# Altium PCB driver_l4_2023-07-21.pcbdoc (part 1 of 2)
Units mil, origin at the board's own origin, x right, y up, seen from the top; angles counter-clockwise.
Board outline 2980 x 3085.67 mil, 2 copper layers (Top Layer, Bottom Layer); 71 components, 86 nets, 273 pads, 209 vias.
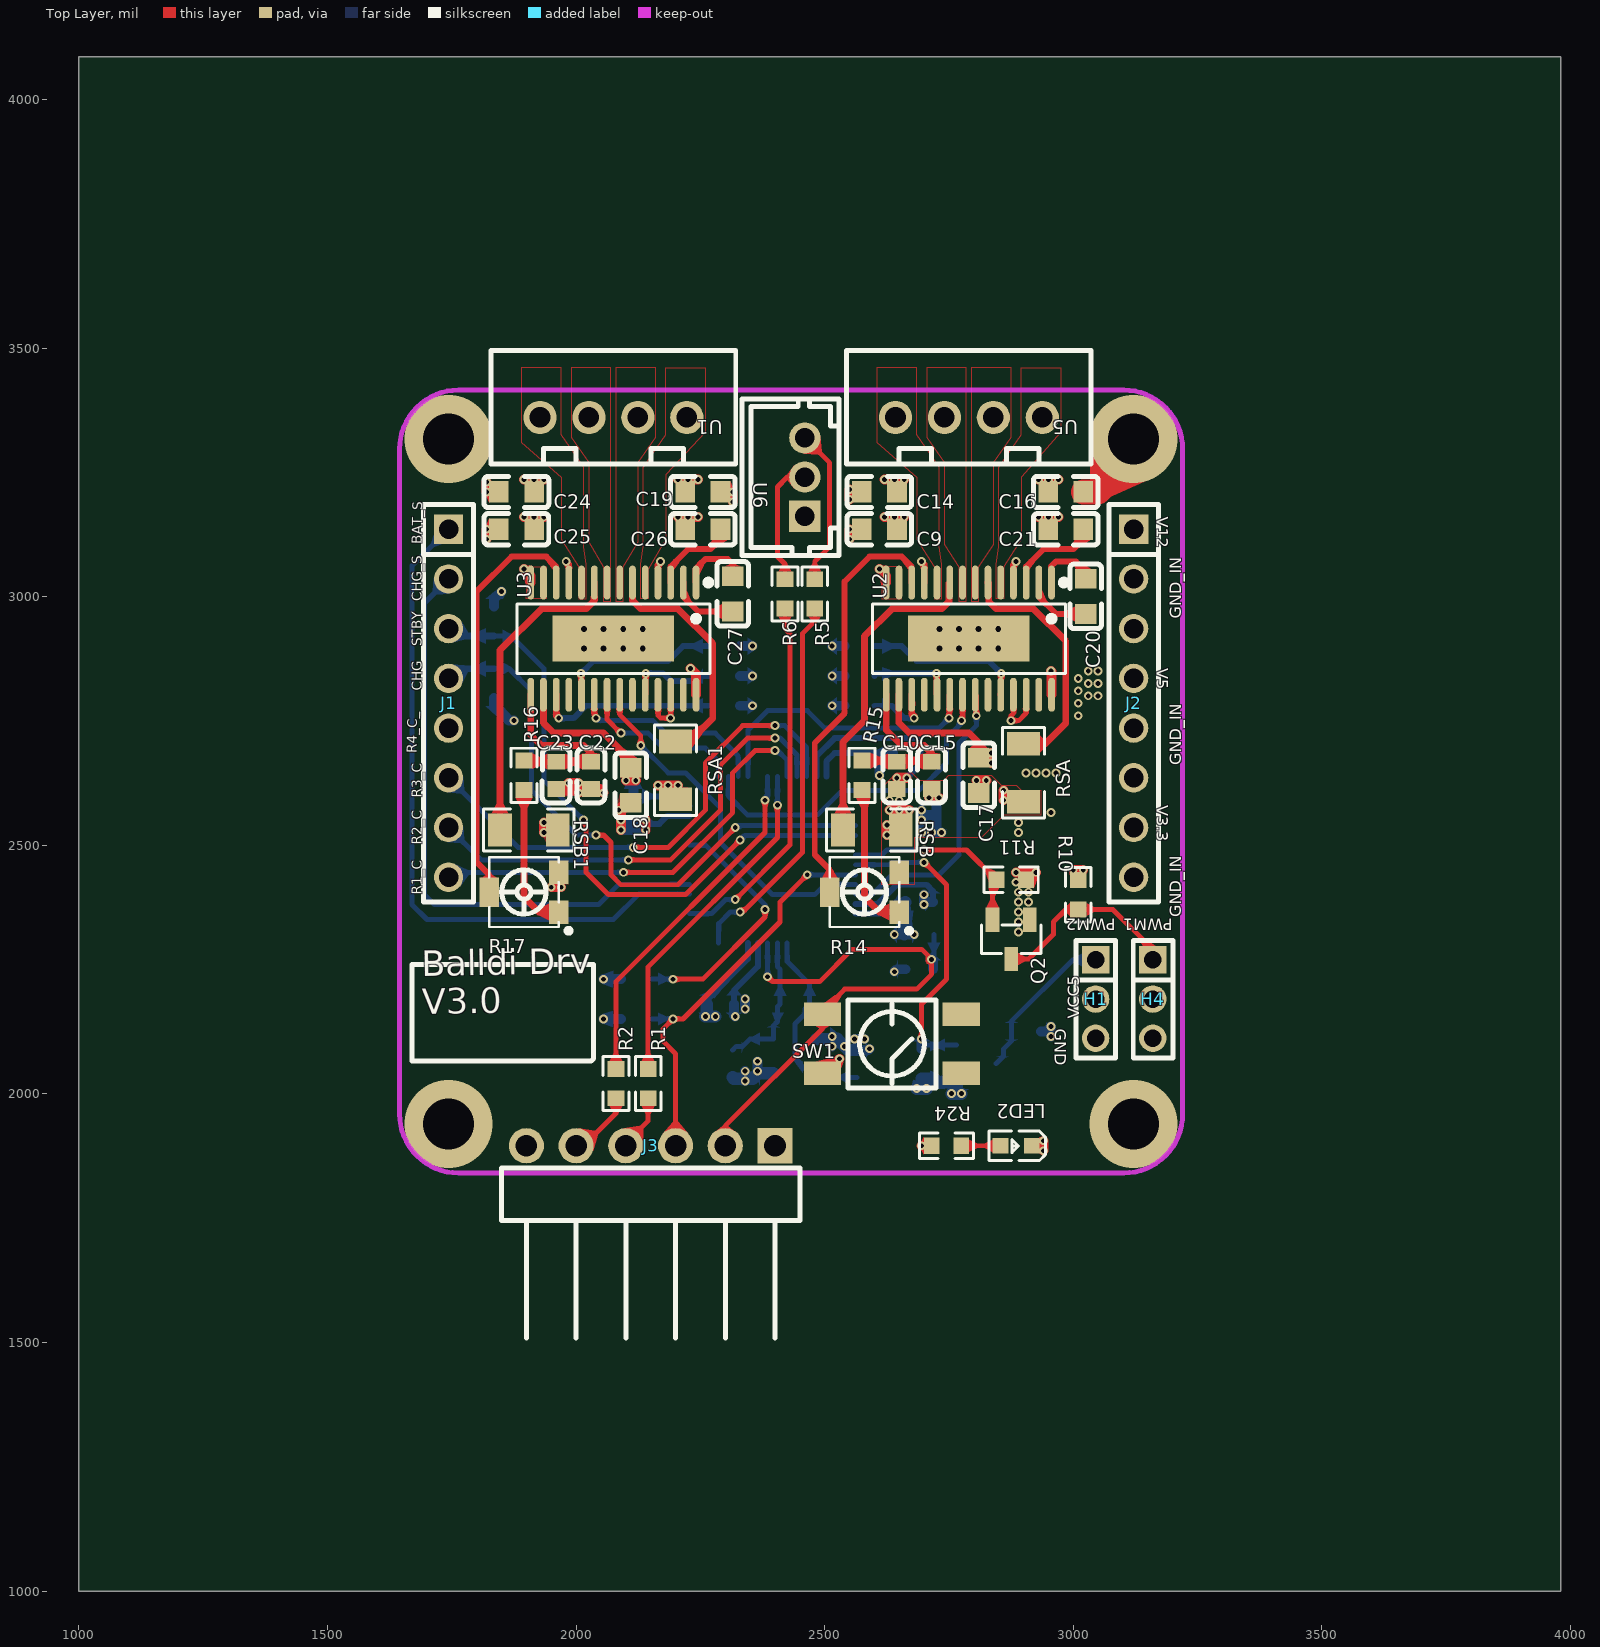
[diagram p0: Top Layer view]
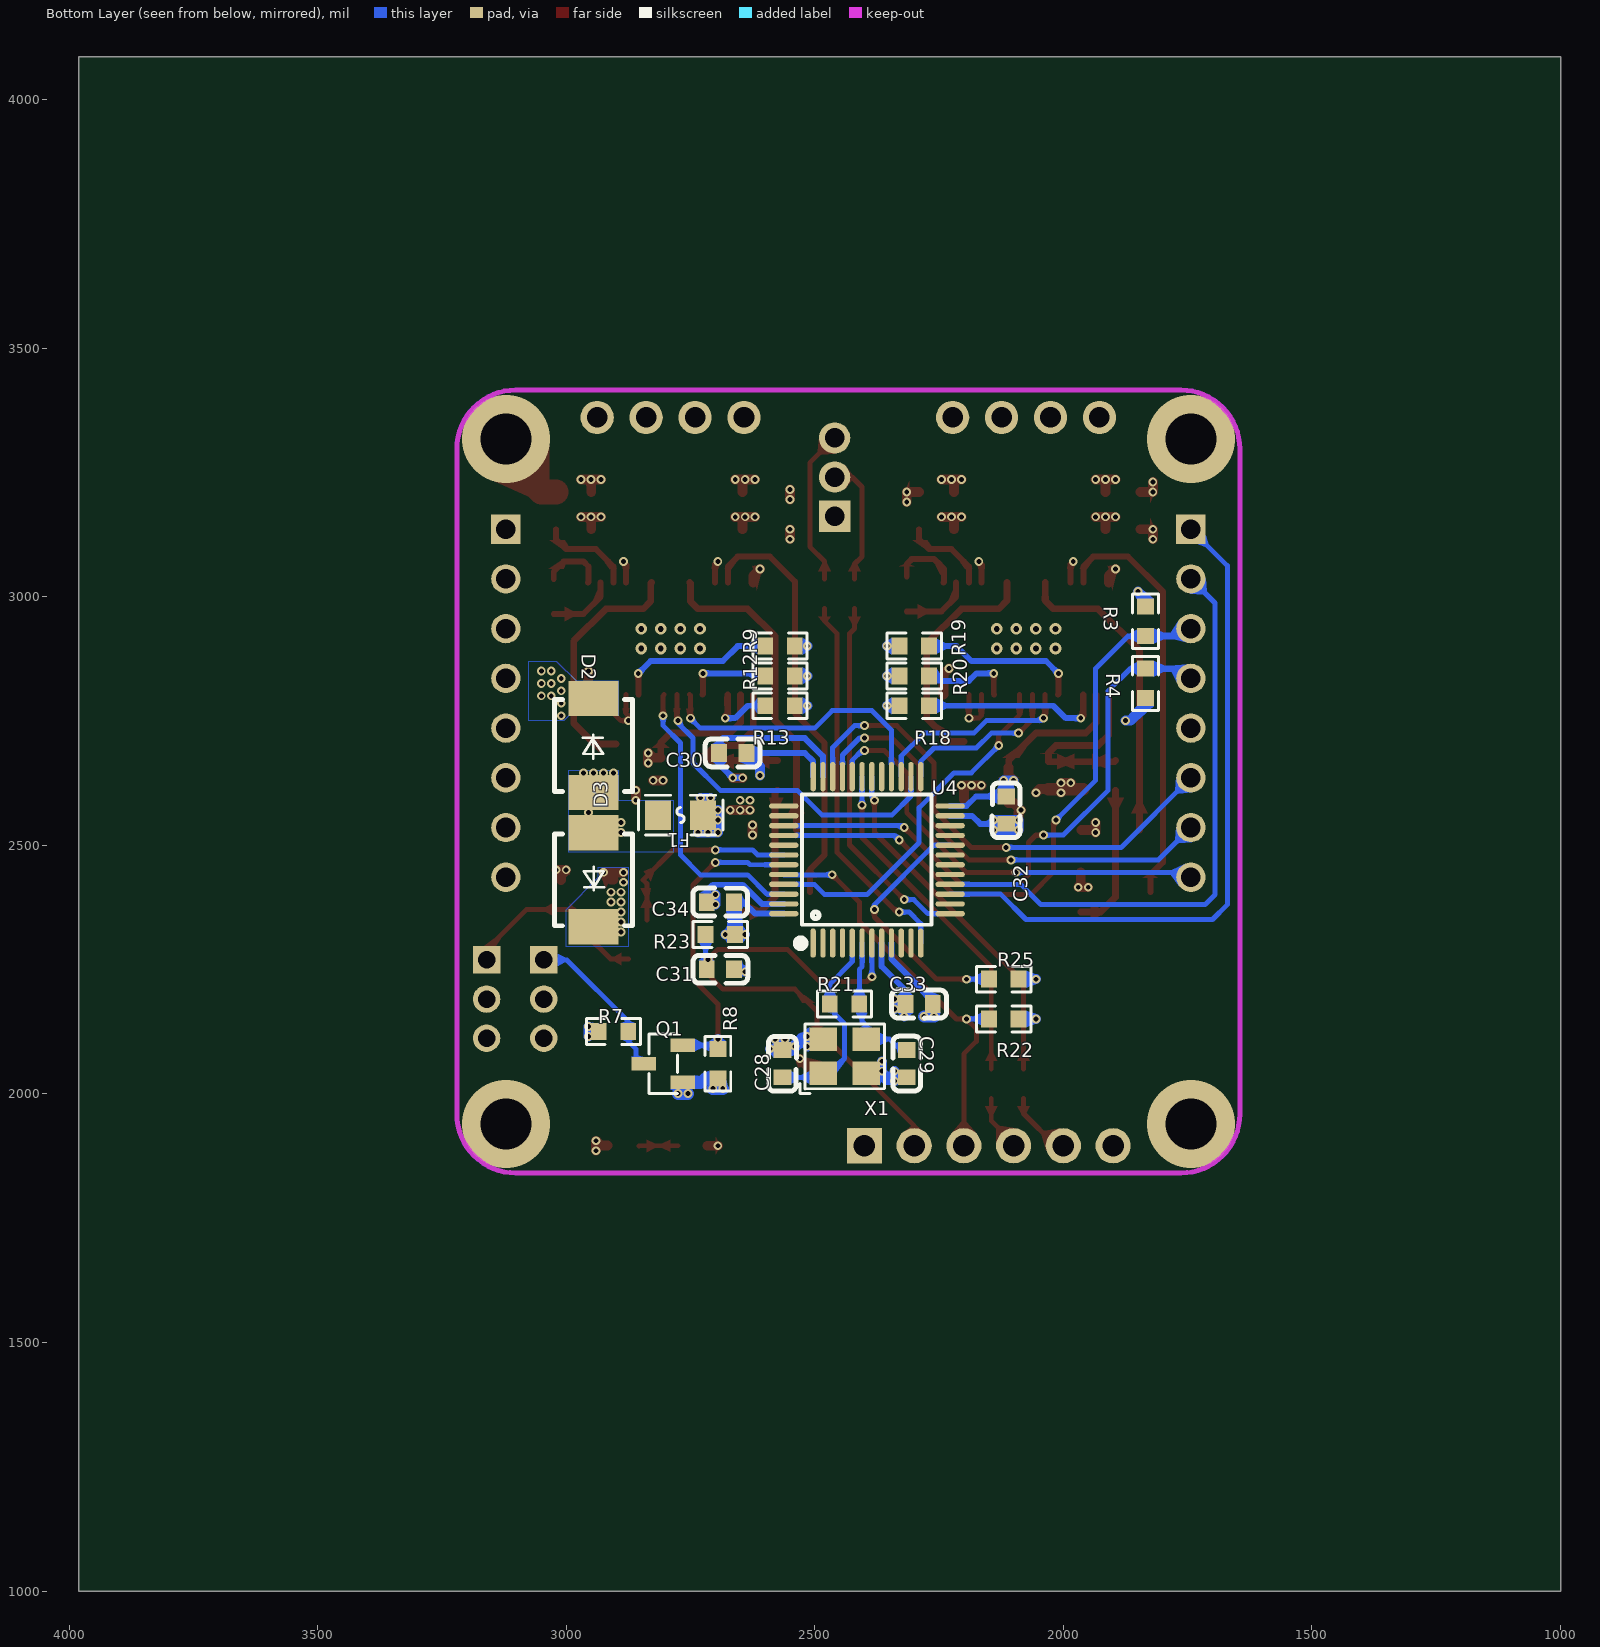
[diagram p1: Bottom Layer view, seen from below]

## Layer stack, top to bottom
Top Layer: signal copper (thickness not stored)
Dielectric: dielectric 12.6, FR-4, Dk 4.8
Bottom Layer: signal copper (thickness not stored)

## Board outline
3980,1000 1000,1000 1000,4085.67 3980,4085.67

## Components (designator, comment, footprint, x,y, rotation, side; value= is the part's Value field where it differs from the comment)
C9 "100nf" C0603#1 2610,3135.67 r0 top
C10 "4.7u" C0603#2 2645,2640.67 r90 top
C14 "10uf" C0603#1 2610.03,3210.67 r0 top
C15 "2.2u" C0603#2 2715,2640.67 r90 top
C16 "100nf" C0603#1 2985,3210.67 r180 top
C17 "100nf" C0603#1 2810,2640.67 r90 top
C18 "100nf" C0603#1 2110,2620.67 r90 top
C19 "100nf" C0603#1 2255,3210.67 r180 top
C20 "22nf" C0603#1 3025,3000.67 r90 top
C21 "100nf" C0603#1 2985,3135.67 r0 top
C22 "2.2u" C0603#2 2030,2640.67 r90 top
C23 "4.7u" C0603#2 1960,2640.67 r90 top
C24 "10uf" C0603#1 1880.04,3210.67 r0 top
C25 "100nf" C0603#1 1880,3135.67 r0 top
C26 "100nf" C0603#1 2255,3135.67 r0 top
C27 "22nf" C0603#1 2315,3005.67 r90 top
C28 "20pF" C0603#3 2565,2060.67 r270 bottom
C29 "20pF" C0603#3 2315,2060.67 r90 bottom
C30 "104" C0603#3 2665,2685.67 r0 bottom
C31 "104" C0603#3 2690,2250.67 r180 bottom
C32 "104" C0603#3 2115,2570.67 r270 bottom
C33 "104" C0603#3 2290,2180.67 r0 bottom
C34 "104" C0603#3 2690,2385.67 r0 bottom
D2 "SMBJ5.0A_C10204" SMB_L4.6-W3.6-LS5.3-R-RD 2945,2700.67 r90 bottom
D3 "SMBJ3.3A_C2990571" SMB_L4.6-W3.6-LS5.3-R-RD 2945,2430.67 r270 bottom
F1 "JK-SMD0805-100" F0805 2770,2560.67 r180 bottom
H1 "PZ200V-11-03P" HDR-TH_3P-P2.00-V-M 3045,2190.67 r270 top
H4 "PZ200V-11-03P" HDR-TH_3P-P2.00-V-M 3160,2190.67 r270 top
J1 "Header2.54mm 1*8P" HDR-TH_8P-P2.54-V-M 1743.42,2785.75 r270 top
J2 "Header2.54mm 1*8P" HDR-TH_8P-P2.54-V-M 3121.38,2785.75 r270 top
J3 "2.54-1*6PHeader-RA" HDR-TH_6P-P2.54-H-M-W10.0 2150,1895.67 r180 top
LED2 "LC191TBCT" LED0603-RD 2885.03,1895.64 r180 top
Q1 "2N7002-TP" SOT-23-3_L2.9-W1.3-P1.90-LS2.4-BR#1 2805,2060.67 r0 bottom
Q2 "2N7002-TP" SOT-23-3_L2.9-W1.3-P1.90-LS2.4-BR#2 2875,2310.67 r90 top
R1 "51" R0603#1 2145,2020.67 r270 top
R2 "51" R0603#1 2080,2020.67 r270 top
R3 "10K" R0603#2 1835,2950.67 r90 bottom
R4 "10K" R0603#2 1835,2825.67 r270 bottom
R5 "51" R0603#1 2480,3005.67 r90 top
R6 "51" R0603#1 2420,3005.67 r90 top
R7 "10K" R0603#2 2905,2125.67 r0 bottom
R8 "10K" R0603#2 2695,2060.67 r270 bottom
R9 "10K" R0603#2 2570,2900.67 r0 bottom
R10 "10K" R0603#1 3010,2400.67 r270 top
R11 "10K" R0603#1 2875,2430.67 r180 top
R12 "10K" R0603#2 2570,2840.67 r0 bottom
R13 "10K" R0603#2 2570,2780.67 r0 bottom
R14 "20kΩ" RES-ADJ-SMD_EVM3ESX50B24 2580,2405.67 r180 top
R15 "20K" R0603#1 2575,2640.67 r90 top
R16 "20K" R0603#1 1895,2640.67 r90 top
R17 "20kΩ" RES-ADJ-SMD_EVM3ESX50B24 1895,2405.67 r180 top
R18 "10K" R0603#2 2300,2780.67 r180 bottom
R19 "10K" R0603#2 2300,2900.67 r180 bottom
R20 "10K" R0603#2 2300,2840.67 r180 bottom
R21 "1M" R0603#2 2440,2180.67 r0 bottom
R22 "10K" R0603#2 2120,2150.67 r180 bottom
R23 "10K" R0603#2 2690,2320.67 r0 bottom
R24 "3.3k" R0603#1 2745,1895.67 r180 top
R25 "10K" R0603#2 2120,2230.67 r180 bottom
RSA "0.5" R1206 2900,2645.67 r90 top
RSA1 "0.5" R1206 2200,2650.67 r90 top
RSB "0.5" R1206 2595,2530.67 r180 top
RSB1 "0.5" R1206 1905,2530.67 r180 top
SW1 "K2-1109SP-A4SA" KEY-SMD_4P-L4.5-W4.5-P3.00-LS7.0 2635,2100.67 r0 top
U1 "XH2.54-4P- 直插" CONN-TH_4P-P2.50-XH2.54-4P 2075,3360.67 r180 top
U2 "TMC2225-SA-T" HTSSOP-28_L9.8-W4.5-P0.65-LS6.6-BL-EP 2790,2915.67 r180 top
U3 "TMC2225-SA-T" HTSSOP-28_L9.8-W4.5-P0.65-LS6.6-BL-EP 2075,2915.67 r180 top
U4 "STM32F103C8T6" LQFP-48_L7.0-W7.0-P0.50-LS9.0-BL 2395,2470.67 r0 bottom
U5 "XH2.54-4P- 直插" CONN-TH_4P-P2.50-XH2.54-4P 2790,3360.67 r180 top
U6 "PH2.0-3P_C9900011646" CONN-TH_3P-P2.00_HX20007-3A 2460,3240.67 r270 top
X1 "X32258MOB4SI" OSC-SMD_4P-L3.2-W2.5-BL 2440,2075.67 r0 bottom

## Footprints (in the part's own frame and the unit in brackets; to place one, negate y for a bottom-side part, rotate by r counter-clockwise, add the part's x,y. Pads: shape width x height; smd on the part's side, far side on the other; paste and mask are expansions set on the pad)
C0603#1 [mm]
  rect 1x1.1 smd paste+0 mask+0.102: 1(-0.9,0) 2(0.9,0)
  silkscreen extent -1.65,-0.8 1.65,0.8
C0603#2 [mm]
  rect 0.8x0.9 smd paste+0 mask+0.051: 1(-0.7,0) 2(0.7,0)
  silkscreen extent -1.41,-0.71 1.39,0.72
C0603#3 [mm]
  rect 0.8x0.9 smd paste+0 mask+0.051: 1(0.7,0) 2(-0.7,0)
  silkscreen extent -1.39,-0.72 1.41,0.71
CONN-TH_3P-P2.00_HX20007-3A [mm]
  rect 1.6x1.6 hole 1 paste+0 mask+0.051: 1(2,0)
  round 1.6 hole 1 paste+0 mask+0.051: 2(0,0) 3(-2,0)
  silkscreen extent -4,-3.2 4,1.75
CONN-TH_4P-P2.50-XH2.54-4P [mm]
  round 1.7 hole 1.05 paste+0 mask+0.05: 1(3.75,0) 2(1.25,0) 3(-1.25,0) 4(-3.75,0)
  silkscreen extent -6.25,-3.42 6.25,2.37
F0805 [mm]
  rect 1.335x1.5 smd paste-100 mask+0.051: 1(1.142,0) 2(-1.142,0)
  silkscreen extent -2.16,-1.02 2.16,1.02
HDR-TH_3P-P2.00-V-M [mm]
  rect 1.4x1.4 hole 0.9 paste+0 mask+0.051: 1(-2,0)
  round 1.4 hole 0.9 paste+0 mask+0.051: 2(0,0) 3(2,0)
  silkscreen extent -2.99,-1 3,1.03
HDR-TH_6P-P2.54-H-M-W10.0 [mm]
  rect 1.8x1.8 hole 1.1 paste+0 mask+0.051: 1(-6.35,0)
  round 1.8 hole 1.1 paste+0 mask+0.051: 2(-3.81,0) 3(-1.27,0) 4(1.27,0) 5(3.81,0) 6(6.35,0)
  silkscreen extent -7.62,1.14 7.62,9.81
HDR-TH_8P-P2.54-V-M [mm]
  rect 1.5x1.5 hole 1 paste+0 mask+0.051: 1(-8.89,0)
  round 1.5 hole 1 paste+0 mask+0.051: 2(-6.35,0) 3(-3.81,0) 4(-1.27,0) 5(1.27,0) 6(3.81,0) 7(6.35,0) 8(8.89,0)
  silkscreen extent -10.16,-1.27 10.16,1.27
HTSSOP-28_L9.8-W4.5-P0.65-LS6.6-BL-EP [mm]
  oval 0.343x1.731 smd paste+0 mask+0.051: 1(-4.225,-2.866) 2(-3.575,-2.866) 3(-2.925,-2.866) 4(-2.275,-2.866) 5(-1.625,-2.866) 6(-0.975,-2.866) 7(-0.325,-2.866) 8(0.325,-2.866) 9(0.975,-2.866) 10(1.625,-2.866) 11(2.275,-2.866) 12(2.925,-2.866) 13(3.575,-2.866) 14(4.225,-2.866) 15(4.225,2.866) 16(3.575,2.866) 17(2.925,2.866) 18(2.275,2.866) 19(1.625,2.866) 20(0.975,2.866) 21(0.325,2.866) 22(-0.325,2.866) 23(-0.975,2.866) 24(-1.625,2.866) 25(-2.275,2.866) 26(-2.925,2.866) 27(-3.575,2.866) 28(-4.225,2.866)
  rect 6.2x2.35 smd paste+0 mask+0.051: 29(0,0)
  silkscreen extent -5,-3.02 4.93,1.77
KEY-SMD_4P-L4.5-W4.5-P3.00-LS7.0 [mm]
  rect 1.9x1.2 smd paste+0 mask+0.051: 1(-3.544,-1.5) 2(3.544,-1.5) 3(3.544,1.5) 4(-3.544,1.5)
  silkscreen extent -2.24,-2.25 2.26,2.25
LED0603-RD [mm]
  rect 0.8x0.8 smd paste+0 mask+0.051: 1(-0.799,-0.003) 2(0.799,0.004)
  silkscreen extent -1.49,-0.75 1.39,0.76
LQFP-48_L7.0-W7.0-P0.50-LS9.0-BL [mm]
  oval 0.27x1.5 smd paste+0 mask+0.05: 1(2.75,4.25) 2(2.25,4.25) 3(1.75,4.25) 4(1.25,4.25) 5(0.75,4.25) 6(0.25,4.25) 7(-0.25,4.25) 8(-0.75,4.25) 9(-1.25,4.25) 10(-1.75,4.25) 11(-2.25,4.25) 12(-2.75,4.25) 25(-2.75,-4.25) 26(-2.25,-4.25) 27(-1.75,-4.25) 28(-1.25,-4.25) 29(-0.75,-4.25) 30(-0.25,-4.25) 31(0.25,-4.25) 32(0.75,-4.25) 33(1.25,-4.25) 34(1.75,-4.25) 35(2.25,-4.25) 36(2.75,-4.25)
  oval 1.5x0.27 smd paste+0 mask+0.05: 13(-4.25,2.75) 14(-4.25,2.25) 15(-4.25,1.75) 16(-4.25,1.25) 17(-4.25,0.75) 18(-4.25,0.25) 19(-4.25,-0.25) 20(-4.25,-0.75) 21(-4.25,-1.25) 22(-4.25,-1.75) 23(-4.25,-2.25) 24(-4.25,-2.75) 37(4.25,-2.75) 38(4.25,-2.25) 39(4.25,-1.75) 40(4.25,-1.25) 41(4.25,-0.75) 42(4.25,-0.25) 43(4.25,0.25) 44(4.25,0.75) 45(4.25,1.25) 46(4.25,1.75) 47(4.25,2.25) 48(4.25,2.75)
  silkscreen extent -3.3,-3.34 3.59,4.46
OSC-SMD_4P-L3.2-W2.5-BL [mm]
  rect 1.4x1.2 smd paste+0 mask+0.051: 1(1.1,0.875) 2(-1.1,0.875) 3(-1.1,-0.875) 4(1.1,-0.875)
  silkscreen extent -2.03,-1.65 2.29,1.9
R0603#1 [mil]
  rect 31.75x34.02 smd paste-3937.01 mask+2: 1(-29.65,0) 2(29.66,0)
  silkscreen extent -55,-26 55,26
R0603#2 [mil]
  rect 31.75x34.02 smd paste-3937.01 mask+2: 1(29.66,0) 2(-29.65,0)
  silkscreen extent -55,-26 55,26
R1206 [mil]
  rect 47.54x66.97 smd paste-3937.01 mask+2: 1(-58.22,0) 2(58.22,0)
  silkscreen extent -91,-42 91,42
RES-ADJ-SMD_EVM3ESX50B24 [mm]
  rect 1x1.2 smd paste+0 mask+0.051: 1(-1.778,1.016) 3(-1.778,-1.016)
  rect 1x1.5 smd paste+0 mask+0.051: 2(1.778,0)
  silkscreen extent -2.41,-1.78 1.78,2.1
SMB_L4.6-W3.6-LS5.3-R-RD [mm]
  rect 1.8x2.54 smd paste+0 mask+0.051: 1(-2.4,0) 2(2.4,0)
  silkscreen extent -2.35,-2 2.35,2
SOT-23-3_L2.9-W1.3-P1.90-LS2.4-BR#1 [mm]
  rect 1.25x0.7 smd paste+0 mask+0.051: 1(-1,0.95) 2(-1,-0.95) 3(1,0)
  silkscreen extent -0.73,-1.53 0.73,1.53
SOT-23-3_L2.9-W1.3-P1.90-LS2.4-BR#2 [mm]
  rect 1.25x0.7 smd paste+0 mask+0.051: 1(1,-0.95) 2(1,0.95) 3(-1,0)
  silkscreen extent -0.73,-1.53 0.73,1.53

## Via types
v1: diameter 17.72, hole 9.84, Top Layer to Bottom Layer, tented both sides, 189 vias
v2: diameter 23.62, hole 11.81, Top Layer to Bottom Layer, tented both sides, 16 vias
v3: diameter 177.17, hole 102.36, Top Layer to Bottom Layer, tented both sides, 4 vias

## Nets (pads, with @x,y where several pads share a name; then routed paths per layer and width w, separated by ;. In a path a pad name is that pad's centre, name@x,y a point inside that pad or via, vN(x,y) a via of type N, cw(c..) or ccw(c..) an arc to the next point about the centre after c; other vN are vias at no path point)
BAT_SAMPLE: J1.1 U4.15 | length 1376.8
  Bottom Layer w10: J1.1@1743.4,3135.77 1670,3062.37 1670,2380.67 1700,2350.67 2075,2350.67 2126.1,2401.77 U4.15@2227.68,2401.77
BOOT0: J3.3 R22.2 U4.44 | length 830
  Top Layer w10: J3.3@2200,1895.67 2200,2080.67 2175,2105.67 2175,2130.67 v1(2195,2150.67) 2215,2150.67 2410,2345.67 2410,2385.67 v1(2465,2440.67)
  Bottom Layer w10: R22.2@2149.66,2150.67 v1(2195,2150.67) ; v1(2465,2440.67) 2561.8,2440.67 U4.44@2562.3,2441.17
BOOT1: R25.2 U4.20 | length 508.9
  Top Layer w10: v1(2195,2230.67) 2255,2230.67 2380,2355.67 v1(2380,2370.67)
  Bottom Layer w10: R25.2@2149.66,2230.67 v1(2195,2230.67) ; U4.20@2227.68,2500.2 2260.5,2500.17 2380,2380.67 v1(2380,2370.67)
C22_2: C22.2 C23.2 R16.2 U3.15 | length 370.5
  Top Layer w13.5: R16.2@1895,2670.37 1897.1,2668.27 2030,2668.27 2030,2685.67 2015,2700.67 1930,2700.67 1908.7,2721.97 U3.15@1908.7,2802.87
C26_2: C26.2 U3.3 | length 175.1
  Top Layer w12.01: U3.3@2190.16,3028.49 2190.2,3060.87 2225,3095.67 2270,3095.67 2290.4,3116.07 C26.2@2290.43,3135.67
C27_1: C27.1 U3.2 | length 140.1
  Top Layer w12.01: U3.2@2215.75,3028.49 2215.7,2999.97 2245.4,2970.27 C27.1@2315,2970.27
C27_2: C27.2 U3.1 | length 139.7
  Top Layer w12.01: U3.1@2241.34,3028.49 2240,3029.87 2240,3055.67 2260,3075.67 2305,3075.67 2315,3065.67 C27.2@2315,3041.1
CHRG1: J1.4 R4.2 U4.39 | length 1211.7
  Top Layer w10: v1(2040,2520.67) 2055,2520.67 2070,2505.67 2070,2440.67 2090,2420.67 2205,2420.67 v1(2320,2535.67)
  Bottom Layer w10: R4.2@1835,2855.37 1865,2855.67 1910,2810.67 1910,2610.67 2000,2520.67 v1(2040,2520.67) ; v1(2320,2535.67) 2323.9,2539.57 U4.39@2562.32,2539.57
  Bottom Layer w13.5: J1.4@1743.4,2835.77 1763,2855.37 R4.2@1835,2855.37
CHRG_SAMPLE: J1.2 U4.16 | length 1213
  Bottom Layer w10: J1.2@1743.4,3035.77 1695,2987.37 1695,2400.67 1715,2380.67 2045,2380.67 2085.8,2421.47 U4.16@2227.68,2421.46
DIR1: U2.20 U4.28 | length 584.6
  Top Layer w10: v1(2750,2755.67) 2750,2801.27 U2.20@2751.6,2802.87
  Bottom Layer w10: U4.28@2345.79,2637.99 2345.8,2731.47 2385,2770.67 2465,2770.67 2500,2735.67 2730,2735.67 v1(2750,2755.67)
DIR2: U3.20 U4.27 | length 409.8
  Top Layer w10: U3.20@2036.6,2802.87 2036.6,2755.67 v1(2040,2755.67)
  Bottom Layer w10: v1(2040,2755.67) 2045,2750.67 2155,2750.67 2180,2725.67 2280,2725.67 2326.1,2679.57 U4.27@2326.1,2637.99
EN1: U2.21 U4.26 | length 688.6
  Top Layer w10: v1(2775,2750.67) 2777.2,2750.67 U2.21@2777.2,2802.87
  Bottom Layer w10: U4.26@2306.42,2637.99 2306.4,2599.27 2345,2560.67 2485,2560.67 2535,2610.67 2690,2610.67 2745,2665.67 2745,2715.67 2775,2745.67 v1(2775,2750.67)
EN2: U3.21 U4.25 | length 339.9
  Top Layer w10: U3.21@2062.2,2802.87 2062.2,2753.47 v1(2090,2725.67)
  Bottom Layer w10: v1(2090,2725.67) 2145,2725.67 2175,2695.67 2260,2695.67 2286.7,2668.97 U4.25@2286.73,2637.99
GND: C9.1 C10.1 C14.1 C15.1 C16.1 C17.1 C18.1 C19.1 C22.1 C23.1 C24.1 C25.1 C28.2 C29.2 C30.1 C31.1 C32.1 C33.1 C34.1 F1.1 H1.3 H4.3 J3.6 LED2.1 R9.2 R12.2 R13.2 R14.3 R17.3 R18.2 R19.2 R20.2 R22.1 R25.1 RSA1.1 RSA.1 RSB1.1 RSB.1 SW1.1 U2.13 U2.14 U2.28 U2.29 U3.13 U3.14 U3.28 U3.29 U4.8 U4.23 U4.35 U4.47 U6.1 X1.2 X1.4 | length 3151.6
  Top Layer w12.01: v1(1895,3055.67) 1908.7,3041.97 U3.14@1908.66,3028.49 ; v1(2610,3055.67) 2623.7,3041.97 U2.14@2623.66,3028.49 ; v1(2955,2850.67) 2956.3,2849.37 U2.28@2956.3,2802.87
  Top Layer w13.5: v1(2230,2855.67) 2241.3,2844.37 U3.28@2241.3,2802.87
  Top Layer w20: v1(1820,3115.67) v1(1820,3135.67) C25.1@1844.57,3135.67 ; v1(1820,3230.67) v1(1820,3210.67) C24.1@1844.6,3210.67 ; v1(1895,3055.67) 1908.7,3041.97 U3.14@1908.66,3028.49 ; v1(1935,2545.67) v1(1935,2525.67) 1940,2530.67 RSB1.1@1963.22,2530.67 ; v1(1950,2415.67) v1(1970,2415.67) 1965,2420.67 R17.3@1965,2445.67 ; v1(1985,2625.67) v1(2005,2625.67) ; v1(2005,2605.67) 2012.4,2613.07 C22.1@2030,2613.11 2047.6,2613.07 v1(2055,2605.67) ; v1(2090,2530.67) v1(2090,2550.67) 2090,2565.67 v1(2085,2570.67) 2099.6,2585.27 C18.1@2110,2585.27 ; v1(2140,2530.67) v1(2140,2550.67) ; v1(2165,2620.67) v1(2205,2620.67) 2200,2615.67 RSA1.1@2200,2592.47 ; v1(2230,2855.67) 2241.3,2844.37 U3.28@2241.3,2802.87 ; C19.1@2290.43,3210.67 v1(2315,3210.67) v1(2315,3190.67) ; SW1.1@2495.47,2041.62 2500.9,2041.57 v1(2530,2070.67) ; v1(2550,3115.67) v1(2550,3135.67) ; v1(2550,3195.67) v1(2550,3215.67) ; v1(2610,3055.67) 2623.7,3041.97 U2.14@2623.66,3028.49 ; v1(2625,2520.67) v1(2625,2540.67) ; v1(2630,2570.67) v1(2670,2570.67) ; v1(2645,2635.67) v1(2665,2635.67) ; v1(2710,2595.67) v1(2730,2595.67) ; v1(2805,2630.67) v1(2825,2630.67) ; v1(2860,2590.67) v1(2860,2610.67) ; LED2.1@2916.5,1895.78 2930.1,1895.77 v1(2940,1905.67) v1(2940,1885.67) ; v1(2955,2850.67) 2956.3,2849.37 U2.28@2956.3,2802.87
  Top Layer w25: C23.1@1960,2613.11 C22.1@2030,2613.11
  Top Layer w50: C16.1@3020.43,3210.67 3050,3210.67 3121.4,3282.07 v3@3121.4,3317.27
  Bottom Layer w12.01: C32.1@2115,2543.11 2167.4,2543.07 2183.6,2559.27 U4.23@2227.7,2559.27 ; C33.1@2317.55,2180.67 2317.6,2208.27 2365.5,2256.17 U4.8@2365.47,2303.35 ; U4.35@2483.58,2637.99 2483.6,2679.27 2520,2715.67 2685,2715.67 2692.6,2708.07 C30.1@2692.55,2685.67 2690,2683.07 2690,2660.67 v1(2665,2635.67) v1(2645,2635.67) ; U4.47@2562.32,2382.09 2606.4,2382.07 2642.9,2418.57 2645,2420.67 2705,2420.67 2717.6,2408.07 C34.1@2717.55,2385.67
  Bottom Layer w20: v1(2055,2150.67) R22.1@2090.34,2150.67 ; v1(2055,2230.67) R25.1@2090.34,2230.67 ; C33.1@2317.55,2180.67 2317.6,2158.07 v1(2320,2155.67) ; R18.2@2329.66,2780.67 v1(2355,2780.67) ; R20.2@2329.66,2840.67 v1(2355,2840.67) ; R19.2@2329.66,2900.67 v1(2355,2900.67) ; v1(2340,2025.67) v1(2340,2045.67) ; v1(2340,2170.67) v1(2340,2190.67) ; v1(2365,2045.67) v1(2365,2065.67) ; X1.4@2483.3,2110.17 2500.6,2110.17 v1(2515,2095.67) ; v1(2515,2780.67) R13.2@2540.34,2780.67 ; v1(2515,2840.67) R12.2@2540.34,2840.67 ; v1(2515,2900.67) R9.2@2540.34,2900.67 ; v1(2560,2110.67) v1(2580,2110.67) ; C28.2@2565,2088.27 2587.6,2088.27 v1(2590,2090.67) ; v1(2640,2245.67) 2645,2250.67 C31.1@2662.45,2250.67 ; v1(2695,2550.67) 2705,2560.67 F1.1@2725.02,2560.67 ; v1(2695,2570.67) v1(2695,2525.67) v1(2735,2525.67) ; v1(2700,2400.67) v1(2700,2380.67) 2705,2385.67 C34.1@2717.55,2385.67 ; v1(2710,2595.67) v1(2730,2595.67) 2725,2590.67 F1.1@2725.02,2560.67 ; v1(2715,2525.67) 2725,2535.67 F1.1@2725.02,2560.67 ; v1(2090,2530.67) v1(2090,2550.67) v1(2140,2550.67) v1(2140,2530.67) v1(2090,2530.67)
  Bottom Layer w25: C29.2@2315,2033.11 2317.4,2030.67 2355,2030.67 2365.5,2041.17 X1.2@2396.69,2041.23 ; X1.4@2483.3,2110.17 2525,2110.67 2547.4,2088.27 C28.2@2565,2088.27
  other v1: 2540,2095.67 2515,2115.67 2650,2570.67 2630,2590.67 2650,2590.67 2185,2620.67
  other v2: 2015.94,2895.98 2055.31,2895.98 2094.68,2895.98 2134.05,2895.98 2730.94,2895.98 2770.31,2895.98 2809.68,2895.98 2849.05,2895.98 2015.94,2935.35 2055.31,2935.35 2094.68,2935.35 2134.05,2935.35 2730.94,2935.35 2770.31,2935.35 2809.68,2935.35 2849.05,2935.35
  other v3: 1743.43,1939.29 3121.38,1939.29 1743.43,3317.24 3121.38,3317.24
H1_1: H1.1 Q1.3 R7.2 | length 318.9
  Bottom Layer w10: Q1.3@2844.37,2060.67 2860,2076.27 2860,2090.67 2875.3,2105.97 R7.2@2875.34,2125.67 2875.3,2145.97 2998.7,2269.37 H1.1@3045,2269.41
H4_1: H4.1 Q2.3 R10.2 | length 395.4
  Top Layer w10: Q2.3@2875,2271.3 2910.6,2271.27 2960,2320.67 2960,2345.67 2985.3,2370.97 R10.2@3010,2371.01 3080,2370.67 3160,2290.67 H4.1@3160,2269.41
J2_2: D2.1 D3.1 F1.2 J2.2 J2.5 J2.8
  other v1: 2890,2525.67 2890,2545.67 2955,2565.67 2905,2645.67 2925,2645.67 2945,2645.67 2965,2645.67
J3_4: J3.4 R1.2 | length 113.9
  Top Layer w10: J3.4@2100,1895.67 2100,1900.67 2145,1945.67 R1.2@2145,1991.01
J3_5: J3.5 R2.2 | length 137.2
  Top Layer w10: J3.5@2000,1895.67 2015,1895.67 2080,1960.67 R2.2@2080,1991.01
M1_OA1: U2.7 U5.3
M1_OA2: U2.5 U5.4
M1_OB1: U2.8 U5.2
M1_OB2: U2.10 U5.1
M2_OA1: U1.3 U3.7
M2_OA2: U1.4 U3.5
M2_OB1: U1.2 U3.8
M2_OB2: U1.1 U3.10
NRST: C31.2 J3.2 R23.1 SW1.4 U4.7 | length 1163.1
  Top Layer w10: J3.2@2300,1895.67 2300,1935.67 2495.5,2131.17 2495.5,2159.77 2495.5,2166.17 2540,2210.67 2685,2210.67 2715,2240.67 v1(2715,2270.67) 2695,2290.67 2555,2290.67 2490,2225.67 2395,2225.67 v1(2385,2235.67)
  Bottom Layer w10: v1(2385,2235.67) 2385,2303.17 U4.7@2385.16,2303.35 ; C31.2@2717.55,2250.67 2717.6,2268.07 v1(2715,2270.67) 2719.7,2275.37 R23.1@2719.66,2320.67
  Bottom Layer w20: v1(2715,2270.67) 2717.6,2268.07 C31.2@2717.55,2250.67
PA0: U4.10
PA1: U4.11
PA4: U4.14
PA7: U4.17
PA8: U4.29
PA14: U4.37
PA15: U4.38
PB0: U4.18
PB1: U4.19
PB5: U4.41
PB10: U4.21
PB11: U4.22
PC13: U4.2
PC14: U4.3
PC15: U4.4
PWM_SERVO: Q2.2 R11.2 U4.42 | length 395.9
  Top Layer w10: v1(2700,2490.67) 2785.3,2490.67 R11.2@2845.34,2430.67 2837.6,2422.97 Q2.2@2837.6,2350.07
  Bottom Layer w10: U4.42@2562.32,2480.51 2614.8,2480.47 2625,2490.67 v1(2700,2490.67)
PWM_SERVO2: Q1.2 R8.2 U4.43 | length 648.4
  Top Layer w10: v1(2695,2110.67) 2695,2180.67 2745,2230.67 2745,2420.67 v1(2700,2465.67)
  Bottom Layer w10: U4.43@2562.3,2460.87 2630.2,2460.87 2635,2465.67 v1(2700,2465.67) ; v1(2695,2110.67) 2695,2090.37 2702.7,2098.07 Q1.2@2765.63,2098.07
  Bottom Layer w20: R8.2@2695,2090.37 v1(2695,2110.67)
R1_CTRL: J1.8 U4.32 | length 874.8
  Top Layer w10: v1(2095,2445.67) 2195,2445.67 2315,2565.67 2315,2645.67 2360,2690.67 v1(2400,2690.67)
  Bottom Layer w10: J1.8@1743.43,2435.75 1753.35,2445.67 v1(2095,2445.67) ; v1(2400,2690.67) 2405,2690.67 2424.5,2671.17 U4.32@2424.53,2637.99
R2_CTRL: J1.7 U4.33 | length 939.6
  Top Layer w10: v1(2105,2470.67) 2190,2470.67 2290,2570.67 2290,2660.67 2345,2715.67 v1(2400,2715.67)
  Bottom Layer w10: J1.7@1743.43,2535.75 1808.51,2470.67 v1(2105,2470.67) ; v1(2400,2715.67) 2410,2715.67 2444.2,2681.47 U4.33@2444.21,2637.99
R3_CTRL: J1.6 U4.34 | length 1012.6
  Top Layer w10: v1(2115,2495.67) 2185,2495.67 2260,2570.67 2260,2665.67 2335,2740.67 v1(2400,2740.67)
  Bottom Layer w10: J1.6@1743.43,2635.75 1883.51,2495.67 v1(2115,2495.67) ; v1(2400,2740.67) 2420,2740.67 2463.9,2696.77 U4.34@2463.9,2637.99
R4_CTRL: J1.5
R5_2: R5.2 U6.3 | length 317.1
  Top Layer w10: U6.3@2460,3319.41 2510,3269.37 2510,3100.67 2480,3070.67 R5.2@2480,3035.37
R6_2: R6.2 U6.2 | length 254.8
  Top Layer w10: R6.2@2420,3035.37 2420,3065.67 2405,3080.67 2405,3220.67 2425,3240.67 U6.2@2460,3240.67
R14_1: R14.1 R15.1 | length 299.8
  Top Layer w13.5: R15.1@2575,2611.01 2580,2605.97 2580,2395.67 2610,2365.67 R14.1@2650,2365.67
R16_1: R16.1 R17.1 | length 297.7
  Top Layer w13.5: R16.1@1895,2611.01 1895,2395.67 1925,2365.67 R17.1@1965,2365.67
R17_2: R17.2 U3.12 | length 844.8
  Top Layer w12.01: R17.2@1825,2405.67 1825,2440.67 1800,2465.67 1800,3010.67 1870,3080.67 1940,3080.67 1959.8,3060.87 U3.12@1959.84,3028.49
R18_1: R18.1 U3.17 | length 365
  Top Layer w13.5: U3.17@1959.8,2802.87 1959.8,2760.87 v1(1965,2755.67)
  Bottom Layer w12.01: v1(1965,2755.67) 1995,2755.67 2020,2780.67 R18.1@2270.34,2780.67
R19_1: R19.1 U3.19 | length 326.3
  Top Layer w12.01: v1(2010,2845.67) 2010,2803.87 U3.19@2011,2802.87
  Bottom Layer w12.01: v1(2010,2845.67) 2035,2870.67 2185,2870.67 2215,2900.67 R19.1@2270.34,2900.67
R20_1: R20.1 U3.24 | length 183.9
  Top Layer w12.01: U3.24@2139,2802.87 2140,2803.87 v1(2140,2845.67)
  Bottom Layer w12.01: v1(2140,2845.67) 2175,2845.67 2190,2830.67 2245,2830.67 2255,2840.67 R20.1@2270.34,2840.67
R24_1: LED2.2 R24.1 | length 78.8
  Top Layer w10: R24.1@2774.66,1895.67 LED2.2@2853.55,1895.51
RSA1_2: RSA1.2 U3.6 | length 478.1
  Top Layer w13.5: U3.6@2113.39,3028.49 2113.4,2992.27 2130,2975.67 2205,2975.67 2275,2905.67 2275,2755.67 2228.2,2708.87 RSA1.2@2200,2708.89
RSB1_2: RSB1.2 U3.9 | length 629.1
  Top Layer w13.5: RSB1.2@1846.78,2530.67 1846.8,2892.47 1930,2975.67 2020,2975.67 2036.6,2992.27 U3.9@2036.61,3028.49
RX_DLD: R1.1 U4.31 | length 695.4
  Top Layer w10: R1.1@2145,2050.37 2145,2255.67 2405,2515.67 v1(2405,2580.67)
  Bottom Layer w10: U4.31@2404.84,2637.99 2405,2637.87 v1(2405,2580.67)
RX_LINUX: R6.1 U4.13 | length 739.1
  Top Layer w10: v1(2320,2390.67) 2430,2500.67 2430,2925.67 2420,2935.67 R6.1@2420,2976.01
  Bottom Layer w10: U4.13@2227.68,2362.4 2272.4,2362.37 2300.6,2390.67 v1(2320,2390.67)
S$48162: 
STDBY1: J1.3 R3.2 U4.40 | length 1280.3
  Top Layer w10: v1(2015,2550.67) 2020,2545.67 2020,2445.67 2065,2400.67 2220,2400.67 v1(2330,2510.67)
  Bottom Layer w10: R3.2@1835,2921.01 1835.3,2920.67 1870,2920.67 1935,2855.67 1935,2630.67 v1(2015,2550.67) ; v1(2330,2510.67) 2339.2,2519.87 U4.40@2562.32,2519.88
  Bottom Layer w13.5: J1.3@1743.4,2935.77 1758.2,2920.97 R3.2@1835,2921.01
STEP1: U2.22 U4.46 | length 578
  Top Layer w10: U2.22@2802.8,2802.87 2805,2800.67 v1(2805,2760.67)
  Bottom Layer w10: U4.46@2562.32,2401.77 2596.1,2401.77 2635,2440.67 2730,2440.67 2770,2480.67 2770,2705.67 2805,2740.67 v1(2805,2760.67)
STEP2: U3.22 U4.45 | length 725.9
  Top Layer w10: U3.22@2087.8,2802.87 2087.8,2762.87 2130,2720.67 v1(2130,2700.67)
  Bottom Layer w10: v1(2130,2700.67) 2185,2645.67 2220,2645.67 2290,2575.67 2290,2505.67 2395,2400.67 2480,2400.67 2500.8,2421.47 U4.45@2562.32,2421.46
SW1_2: SW1.2
SW1_3: SW1.3
TX_DLD: R2.1 U4.30 | length 714
  Top Layer w10: R2.1@2080,2050.37 2080,2225.67 2380,2525.67 v1(2380,2590.67)
  Bottom Layer w10: v1(2380,2590.67) 2385.2,2595.87 U4.30@2385.16,2637.99
TX_LINUX: R5.1 U4.12 | length 767.3
  Top Layer w10: v1(2330,2365.67) 2335,2365.67 2455,2485.67 2455,2925.67 2480,2950.67 R5.1@2480,2976.01
  Bottom Layer w10: U4.12@2286.73,2303.35 2286.7,2342.37 2310,2365.67 v1(2330,2365.67)
U2_1: C20.2 U2.1 | length 129.7
  Top Layer w12.01: U2.1@2956.34,3028.49 2955,3029.87 2955,3060.67 2965,3070.67 3005,3070.67 3025,3050.67 C20.2@3025,3036.1
U2_2: C20.1 U2.2 | length 137.1
  Top Layer w12.01: U2.2@2930.8,3028.47 2930.8,2999.97 2965.4,2965.27 C20.1@3025,2965.27
U2_3: C21.2 U2.3 | length 190.1
  Top Layer w12.01: U2.3@2905.16,3028.49 2905.2,3060.87 2940,3095.67 3000,3095.67 3020.4,3116.07 C21.2@3020.43,3135.67
U2_6: RSA.2 U2.6 | length 493.9
  Top Layer w13.5: U2.6@2828.39,3028.49 2830,3026.87 2830,2990.67 2845,2975.67 2920,2975.67 2985,2910.67 2985,2745.67 2943.2,2703.87 RSA.2@2900,2703.89
U2_9: RSB.2 U2.9 | length 645.4
  Top Layer w13.5: RSB.2@2536.78,2530.67 2536.8,2707.47 2580,2750.67 2580,2920.67 2635,2975.67 2735,2975.67 2750,2990.67 2750,3026.87 U2.9@2751.61,3028.49
U2_12: R14.2 U2.12 | length 858.4
  Top Layer w12.01: R14.2@2510,2405.67 2510,2450.67 2480,2480.67 2480,2705.67 2540,2765.67 2540,3030.67 2590,3080.67 2655,3080.67 2674.8,3060.87 U2.12@2674.84,3028.49
U2_15: C10.2 C15.2 R15.2 U2.15 | length 339.6
  Top Layer w13.5: R15.2@2575,2670.37 2712.9,2670.37 2715,2668.27 2715,2685.67 2700,2700.67 2655,2700.67 2623.7,2731.97 U2.15@2623.7,2802.87
U2_17: R13.1 U2.17 | length 139.9
  Top Layer w13.5: U2.17@2674.8,2802.87 2675,2765.67 2680,2760.67 v1(2680,2755.67)
  Bottom Layer w12.01: R13.1@2599.66,2780.67 2622.2,2780.67 2635,2780.67 2660,2755.67 v1(2680,2755.67)
U2_19: R12.1 U2.19 | length 173.5
  Top Layer w12.01: v1(2725,2845.67) 2725,2803.87 U2.19@2726,2802.87
  Bottom Layer w12.01: R12.1@2599.66,2840.67 2599.7,2845.67 v1(2725,2845.67)
U2_24: R9.1 U2.24 | length 321.3
  Top Layer w12.01: U2.24@2854,2802.87 2855,2803.87 v1(2855,2845.67)
  Bottom Layer w12.01: R9.1@2599.66,2900.67 2655,2900.67 2685,2870.67 2830,2870.67 v1(2855,2845.67)
U4_1: U4.1
U4_5: C28.1 R21.1 U4.5 X1.1 | length 404.1
  Bottom Layer w10: U4.5@2424.53,2303.35 2424.5,2266.17 2469.7,2220.37 R21.1@2469.66,2180.67 2460,2170.97 2460,2160.67 2440,2140.67 2440,2070.67 2469.5,2041.17 X1.1@2483.3,2041.23 2491.4,2033.07 C28.1@2565,2033.12
U4_6: C29.1 R21.2 U4.6 X1.3 | length 291.9
  Bottom Layer w10: C29.1@2315,2088.27 2322.4,2095.67 2335,2095.67 2349.5,2110.17 2396.7,2110.17 2396.7,2137.37 2405,2145.67 2405,2175.37 R21.2@2410.34,2180.67 2410.3,2250.37 2404.8,2255.87 U4.6@2404.84,2303.35
VCC3.3: C17.2 C18.2 C30.2 C32.2 C33.2 C34.2 D3.2 J2.7 J3.1 Q1.1 Q2.1 R3.1 R4.1 R8.1 R11.1 R23.2 R24.2 U2.16 U2.25 U2.26 U3.16 U3.25 U3.26 U4.9 U4.24 U4.36 U4.48 | length 3776.3
  Top Layer w10: U3.25@2164.6,2802.87 2165,2760.67 2170,2755.67 v1(2190,2755.67) 2190,2765.67 U3.26@2190.2,2802.87 ; U2.25@2879.6,2802.87 2880,2765.67 2875,2760.67 v1(2875,2750.67) 2890,2750.67 2905,2765.67 U2.26@2905.2,2802.87
  Top Layer w13.5: U3.16@1934.3,2802.87 1934.3,2746.37 1955,2725.67 2055,2725.67 2110,2670.67 C18.2@2110,2656.1 ; U2.16@2649.2,2802.87 2649.2,2746.47 2670,2725.67 2790,2725.67 2810,2705.67 C17.2@2810,2676.1
  Top Layer w20: C18.2@2110,2656.1 2110,2640.67 v1(2100,2630.67) v1(2120,2630.67) ; v1(2695,1895.67) R24.2@2715.34,1895.67 ; C17.2@2810,2676.1 2825.4,2676.07 v1(2835,2685.67) v1(2835,2665.67) ; v1(2885,2445.67) v1(2925,2445.67) 2910,2430.67 R11.1@2904.66,2430.67
  Mid-Layer 2 w20: v1(2120,2630.67) 2145,2655.67 2515,2655.67 2530,2640.67 v1(2610,2640.67) ; v1(2280,2155.67) 2280,2240.67 2360,2320.67 v1(2640,2320.67) ; J3.1@2400,1895.67 2670,1895.67 v1(2775,2000.67) ; 2765.06,2320.67 v1(2680,2320.67) 2885,2320.67 v1(2890,2325.67)
  Bottom Layer w12.01: C32.2@2115,2598.27 2175.8,2598.27 2195.1,2578.97 U4.24@2227.7,2578.97 ; C33.2@2262.45,2180.67 2262.4,2188.07 2345.8,2271.47 U4.9@2345.79,2303.35 ; U4.36@2503.27,2637.99 2503.3,2668.97 2520,2685.67 C30.2@2637.45,2685.67 ; U4.48@2562.32,2362.4 2620,2362.37 2643.3,2385.67 C34.2@2662.45,2385.67
  Bottom Layer w20: R4.1@1835,2796.01 1835,2780.67 1865,2750.67 v1(1875,2750.67) ; R3.1@1835,2980.37 1835,2995.67 v1(1850,3010.67) ; C32.2@2115,2598.27 2115,2630.67 v1(2100,2630.67) v1(2120,2630.67) ; v1(2610,2640.67) 2610,2658.27 C30.2@2637.45,2685.67 ; v1(2640,2320.67) R23.2@2660.34,2320.67 v1(2680,2320.67)
  Bottom Layer w25: C33.2@2262.45,2180.67 2262.4,2158.07 v1(2260,2155.67) v1(2280,2155.67) ; R23.2@2660.34,2320.67 2660.3,2383.57 C34.2@2662.45,2385.67 ; v1(2705,2010.67) v1(2685,2010.67) 2695,2020.67 R8.1@2695,2031.01 2720,2030.67 2727.4,2023.27 Q1.1@2765.63,2023.27 2765.6,2011.27 v1(2755,2000.67) v1(2775,2000.67)
  other v1: 2890,2345.67 2890,2365.67 2890,2385.67 2910,2385.67 2890,2405.67 2910,2405.67 2885,2425.67
VCC5: D2.2 H1.2 H4.2 J2.4 R7.1 R10.1 | length 88.9
  Top Layer w20: R10.1@3010,2430.37 3010,2440.67 v1(3000,2450.67) v1(3020,2450.67)
  Bottom Layer w20: R7.1@2934.66,2125.67 2945,2125.67 v1(2955,2135.67) v1(2955,2115.67)
  other v1: 3010,2760.67 3010,2785.67 3030,2800.67 3050,2800.67 3010,2810.67 3030,2825.67 3050,2825.67 3010,2835.67 3030,2850.67 3050,2850.67
VCC12: C9.2 C14.2 C16.2 C19.2 C21.1 C24.2 C25.2 C26.1 J2.1 U2.4 U2.11 U3.4 U3.11 | length 706.7
  Top Layer w12.01: v1(1980,3070.67) 1985.4,3065.27 U3.11@1985.43,3028.49 ; U3.4@2164.57,3028.49 2164.6,3065.27 v1(2170,3070.67) ; v1(2695,3070.67) 2700.4,3065.27 U2.11@2700.43,3028.49 ; U2.4@2879.57,3028.49 2879.6,3065.27 v1(2885,3070.67)
  Top Layer w20: v1(1895,3160.67) v1(1935,3160.67) ; v1(1895,3235.67) v1(1935,3235.67) ; v1(1915,3160.67) C25.2@1915.43,3135.67 ; v1(1915,3235.67) C24.2@1915.4,3210.67 ; v1(2205,3160.67) v1(2245,3160.67) ; v1(2205,3235.67) v1(2245,3235.67) ; C26.1@2219.57,3135.67 2219.6,3155.27 v1(2225,3160.67) ; C19.2@2219.57,3210.67 2219.6,3230.27 v1(2225,3235.67) ; v1(2620,3160.67) v1(2660,3160.67) ; v1(2620,3235.67) v1(2660,3235.67) ; v1(2640,3160.67) 2645.4,3155.27 C9.2@2645.43,3135.67 ; v1(2640,3235.67) 2645.4,3230.27 C14.2@2645.4,3210.67 ; v1(2930,3160.67) v1(2970,3160.67) ; v1(2930,3235.67) v1(2970,3235.67) ; C21.1@2949.57,3135.67 v1(2950,3160.67) ; C16.2@2949.57,3210.67 v1(2950,3235.67)
pads on no net: J2.3 J2.6 U2.18 U2.23 U2.27 U3.18 U3.23 U3.27
copper on no net: | length 0

## Polygon pours and split planes (outlines as drawn)
J2_2 on Bottom Layer (solid): 2785,2590.67 2785,2485.67 2995,2485.67 2995,2650.67 2895,2650.67 2895,2590.67
VCC3.3 on Bottom Layer (solid): 2875,2455.67 2875,2295.67 3000,2295.67 3000,2370.67 2935,2435.67 2935,2455.67
VCC5 on Bottom Layer (solid): 2895,2830.67 2895,2760.67 2995,2760.67 3005,2750.67 3075,2750.67 3075,2870.67 3020,2870.67 2980,2830.67 2970,2830.67
VCC12 on Mid-Layer 2 (solid): 1895,3250.67 1895,3135.67 1970,3060.67 1990,3060.67 1990,3115.67 1945,3160.67 1945,3250.67
VCC12 on Mid-Layer 2 (solid): 2195,3245.67 2195,3155.67 2160,3120.67 2160,3065.67 2160,3060.67 2180,3060.67 2250,3130.67 2250,3245.67
VCC12 on Mid-Layer 2 (solid): 2620,3245.67 2620,3130.67 2685,3060.67 2705,3060.67 2705,3120.67 2670,3155.67 2670,3245.67
VCC12 on Mid-Layer 2 (solid): 2925,3245.67 2925,3150.67 2875,3100.67 2875,3060.67 2895,3060.67 2980,3145.67 2980,3245.67 2975,3245.67
VCC12 on Mid-Layer 2 (solid): 3155,3170.67 3090,3170.67 3005,3305.67 2590,3305.67 2590,3425.67 2275,3425.67 2275,3305.67 1895,3305.67 1895,3220.67 2290,3220.67 2290,3250.67 2415,3250.67 2415,3320.67 2505,3320.67 2505,3250.67 2570,3250.67 2595,3225.67 2985,3225.67 3000,3200.67 3000,3100.67 3155,3100.67
VCC5 on Mid-Layer 2 (solid): 3155,2870.67 3020,2870.67 2995,2845.67 2995,2370.67 2940,2310.67 2940,2105.67 3000,2105.67 3000,2160.67 3195,2160.67 3195,2225.67 3075,2225.67 3075,2800.67 3155,2800.67
VCC3.3 on Mid-Layer 2 (solid): 2925,2460.67 2925,2335.67 2900,2310.67 2765,2310.67 2765,2460.67
VCC3.3 on Mid-Layer 2 (solid): 2665,1880.67 2705,1880.67 2835,2015.67 2835,2250.67 2835,2280.67 2890,2335.67 2750,2335.67 2750,2090.67 2665,2005.67 2610,1950.67
VCC3.3 on Mid-Layer 2 (solid): 2085,2675.67 2085,2620.67 2135,2620.67 2210,2695.67 2210,2765.67 2185,2765.67 2180,2760.67 2180,2735.67 2180,2720.67 2135,2675.67 2130,2675.67
VCC3.3 on Mid-Layer 2 (solid): 2865,2760.67 2865,2745.67 2820,2700.67 2820,2650.67 2850,2650.67 2885,2690.67 2885,2760.67
VCC3.3 on Mid-Layer 2 (solid): 2620,2655.67 2620,2625.67 2600,2605.67 2600,2395.67 2640,2355.67 2720,2355.67 2770,2400.67 2770,2300.67 2685,2300.67 2385,2300.67 2295,2210.67 2295,2135.67 2240,2135.67 2240,2245.67 2350,2355.67 2475,2355.67 2515,2395.67 2515,2655.67
VCC3.3 on Mid-Layer 2 (solid): 2365,1930.67 2365,1860.67 2630,1860.67 2650,1880.67 2685,1880.67 2685,1955.67 2680,1950.67 2610,1950.67 2590,1930.67 2475,1930.67
VCC3.3 on Mid-Layer 2 (solid): 2820,2700.67 2545,2700.67 2545,2620.67 2615,2620.67 2620,2625.67 2620,2650.67 2850,2650.67
VCC3.3 on Mid-Layer 2 (solid): 2085,2620.67 2510,2620.67 2545,2585.67 2555,2585.67 2555,2675.67 2300,2675.67 2210,2750.67
VCC3.3 on Mid-Layer 2 (solid): 1885,3025.67 1830,3025.67 1830,2640.67 2065,2640.67 2085,2620.67 2115,2675.67 2085,2675.67 2055,2705.67 1885,2705.67
J2_2 on Mid-Layer 1 (solid): 3085,3070.67 3085,3000.67 3160,3000.67 3160,2785.67 3045,2785.67 3045,2755.67 3010,2720.67 2865,2720.67 2865,2635.67 2885,2635.67 2885,2520.67 2910,2520.67 2940,2550.67 3005,2610.67 3070,2670.67 3165,2670.67 3165,2470.67 3090,2470.67 3085,2470.67 3085,2400.67 3250,2400.67 3250,3070.67
VCC3.3 on Mid-Layer 1 (solid): 3155,2570.67 3155,2500.67 3005,2500.67 2930,2425.67 2930,2310.67 2875,2310.67 2875,2465.67 2980,2570.67 3150,2570.67
GND on Mid-Layer 1 (solid): 1525,3570.67 1540,3585.67 3480,3585.67 3425,3530.67 3425,1765.67 3405,1745.67 1500,1745.67
M2_OB1 on Top Layer (solid): 1990,3460.67 1990,3320.67 2025,3270.67 2025,3110.67 2055,3060.67 2055,2990.67 2070,2990.67 2070,3310.67 2070,3460.67
M2_OA1 on Top Layer (solid): 2080,3460.67 2080,2990.67 2095,2990.67 2095,3060.67 2125,3110.67 2125,3125.67 2125,3270.67 2160,3320.67 2160,3460.67
M2_OB2 on Top Layer (solid): 1890,3460.67 1890,3310.67 1970,3240.67 1970,3115.67 2005,3060.67 2005,2995.67 2020,2995.67 2020,3065.67 2015,3100.67 2015,3260.67 1970,3325.67 1970,3460.67
M2_OA2 on Top Layer (solid): 2130,2995.67 2130,3065.67 2135,3100.67 2135,3260.67 2180,3325.67 2180,3460.67 2260,3460.67 2260,3330.67 2180,3245.67 2180,3115.67 2145,3055.67 2145,2995.67
M1_OB2 on Top Layer (solid): 2605,3460.67 2605,3310.67 2685,3240.67 2685,3115.67 2720,3060.67 2720,2995.67 2735,2995.67 2735,3065.67 2730,3100.67 2730,3260.67 2685,3325.67 2685,3460.67
M1_OB1 on Top Layer (solid): 2705,3460.67 2705,3320.67 2740,3270.67 2740,3105.67 2770,3060.67 2770,2990.67 2785,2990.67 2785,3460.67
M1_OA1 on Top Layer (solid): 2795,3460.67 2795,2990.67 2810,2990.67 2810,3060.67 2840,3105.67 2840,3125.67 2840,3270.67 2875,3320.67 2875,3460.67
M1_OA2 on Top Layer (solid): 2845,2995.67 2845,3065.67 2850,3100.67 2850,3260.67 2895,3325.67 2895,3460.67 2975,3460.67 2975,3330.67 2895,3240.67 2895,3115.67 2860,3060.67 2860,2995.67
GND on Top Layer (solid): 1905,3060.67 1940,3060.67 1940,2995.67 1900,2995.67
GND on Top Layer (solid): 2615,3060.67 2615,2995.67 2655,2995.67 2655,3060.67
GND on Top Layer (solid): 1985,2405.67 1925,2405.67 1925,2635.67 2040,2635.67 2070,2605.67 2135,2605.67 2160,2630.67 2235,2630.67 2235,2570.67 2185,2520.67 2085,2520.67 2035,2570.67 1985,2570.67
GND on Top Layer (solid): 2680,2420.67 2615,2420.67 2615,2615.67 2645,2645.67 2675,2645.67 2690,2630.67 2740,2630.67 2750,2640.67 2835,2640.67 2855,2620.67 2885,2620.67 2895,2610.67 2935,2610.67 2935,2560.67 2860,2560.67 2815,2515.67 2680,2515.67

## Keep-outs
Keep-Out Layer:
  lines w10: 1645,1958.98 ccw(c1763.11,1958.98) 1763.11,1840.87 ; 1645,3297.56 cw(c1763.11,3297.56) 1763.11,3415.67 ; 3101.69,1840.87 ccw(c3101.69,1958.98) 3219.8,1958.98 ; 3101.69,3415.67 cw(c3101.69,3297.56) 3219.8,3297.56

## Other copper
Top Layer:
  region net DIR2: 2043.36,2775.51 2029.86,2775.51 2031.61,2760.51 2041.61,2760.51
  region net EN2: 2068.95,2775.51 2055.45,2775.51 2057.2,2760.51 2067.2,2760.51
  region net STEP2: 2094.54,2775.51 2081.04,2775.51 2082.79,2762.88 2092.79,2762.88
  region net VCC3.3: 2171.32,2775.7 2157.82,2775.31 2160,2760.52 2170,2760.81
  region net VCC3.3: 2196.91,2775.39 2183.41,2775.62 2185,2765.75 2195,2765.59
  region net GND: 2248.09,2830.17 2234.59,2830.17 2234.59,2844.33 2248.09,2844.33
  region net GND: 1901.91,3033.75 1910.63,3062.28 1899.25,3059.91 1895,3047.18
  region net GND: 1901.91,3012.58 1906.86,3062.33 1902.07,3062.74 1894.84,3041.69
  region net R17_2: 1953.09,3055.07 1966.55,3056.57 1953.34,3075.82 1942.42,3069.75
  region net VCC12: 1992.18,3055.82 1978.68,3055.82 1979.43,3065.24 1991.43,3065.24
  region net RSB1_2: 2043.36,3001.15 2029.86,3001.16 2029.85,2992.28 2043.35,2992.26
  region net RSA1_2: 2120.14,3001.16 2106.64,3001.15 2106.65,2992.26 2120.15,2992.28
  region net VCC12: 2171.32,3055.82 2157.82,3055.82 2158.57,3065.24 2170.57,3065.24
  region net C26_2: 2183.45,3056.57 2196.91,3055.07 2207.58,3069.75 2196.66,3075.82
  region net C27_1: 2222.5,3012.35 2212.26,2995.37 2223.48,2983.7 2230.77,2993.39
  region net C27_2: 2237.88,3061.62 2248.09,3044.49 2256.35,3063.53 2249.09,3073.25
  region net U2_17: 2673.77,2771.79 2681.59,2798.98 2681.67,2780.6 2673.77,2771.79
  region net U2_17: 2668.25,2765.63 2673.77,2771.79 2672.97,2769.02 2668.25,2765.63
  region net DIR1: 2758.32,2774.78 2744.9,2776.23 2745,2761.13 2755,2760.05
  region net EN1: 2783.95,2775.51 2770.45,2775.51 2772.2,2760.51 2782.2,2760.51
  region net VCC3.3: 2886.32,2775.8 2872.82,2775.21 2875,2765.45 2885,2765.89
  region net VCC3.3: 2911.91,2775.39 2898.41,2775.62 2900,2765.75 2910,2765.59
  region net GND: 2963.09,2830.17 2949.59,2830.17 2950.33,2848.18 2962.34,2848.18
  region net GND: 2616.91,3033.75 2625.64,3062.28 2614.25,3059.91 2610,3047.18
  region net GND: 2616.91,3012.58 2621.87,3062.33 2617.07,3062.74 2609.84,3041.69
  region net U2_12: 2668.09,3055.07 2681.55,3056.57 2668.34,3075.82 2657.42,3069.75
  region net VCC12: 2707.18,3055.82 2693.68,3055.82 2694.43,3065.24 2706.43,3065.24
  region net VCC12: 2886.32,3055.82 2872.82,3055.82 2873.57,3065.24 2885.57,3065.24
  region net U2_3: 2898.45,3056.57 2911.91,3055.07 2922.58,3069.75 2911.66,3075.82
  region net U2_2: 2937.5,3012.35 2927.27,2995.37 2938.48,2983.7 2945.78,2993.39
  region net RX_LINUX: 2407.5,2960.14 2432.5,2960.14 2425,2945.14 2415,2945.14
  region net R6_2: 2407.5,3051.2 2432.5,3051.2 2425,3065.67 2415,3065.67
  region net TX_LINUX: 2467.5,2960.14 2492.5,2960.14 2485,2950.67 2475,2950.67
  region net R5_2: 2467.5,3051.2 2492.5,3051.2 2485,3066.2 2475,3066.2
  region net H4_1: 3141.2,2296.97 3166.2,2296.97 3145.77,2311.97 3131.63,2311.97
  region net GND: 2931.29,1911.53 2932.25,1880.03 2940.42,1891.94 2932.93,1912.74
  region net R24_1: 2837.8,1883.01 2837.8,1908.01 2822.8,1900.55 2822.8,1890.55
  region net GND: 2484.48,2065.23 2532.87,2052.65 2537.07,2063.6 2518.78,2073.59
  region net NRST: 2508,2136.1 2483,2136.1 2490.5,2131.17 2500.5,2131.17
  region net NRST: 2500.17,2183.34 2525.17,2183.34 2534.75,2198.34 2520.6,2198.34
  region net RSB1_2: 1829.92,2564.15 1863.68,2564.15 1853.55,2584.41 1840.05,2584.41
  region net U2_9: 2519.92,2564.15 2553.68,2564.15 2543.55,2584.41 2530.05,2584.41
  region net RSA1_2: 2233.48,2731.03 2233.48,2697.27 2253.74,2724.86 2253.74,2743.96
  region net U2_6: 2933.49,2720.77 2933.49,2687.01 2943.22,2697.14 2943.22,2710.64
  region net R24_1: 2790.53,1883.13 2790.53,1908.13 2805.53,1900.59 2805.53,1890.59
  region net VCC3.3: 2699.47,1878.66 2699.47,1912.68 2695,1905.67 2695,1885.67
  region net R17_2: 1809.99,2435.2 1840.01,2435.2 1831,2440.67 1819,2440.67
  region net R16_1: 1945.31,2348.79 1945.31,2382.55 1925.06,2372.42 1925.06,2358.92
  region net R16_1: 1878.12,2595.14 1911.88,2595.14 1901.75,2574.88 1888.25,2574.88
  region net C22_2: 1912.01,2685.11 1912.01,2654.45 1932.26,2661.48 1932.26,2674.98
  region net R14_1: 2563.12,2595.14 2592.01,2595.14 2586.75,2574.88 2573.25,2574.88
  region net U2_15: 2592.01,2686.2 2592.01,2654.45 2612.26,2663.58 2612.26,2677.08
  region net U2_12: 2494.99,2435.2 2525.01,2435.2 2516,2450.67 2504,2450.67
  region net R14_1: 2630.32,2348.79 2630.32,2382.55 2610.06,2372.42 2610.06,2358.92
  region net VCC3.3: 2903.1,2447.68 2920.53,2413.66 2929.79,2436.32 2917.93,2452.74
  region net PWM_SERVO: 2829.47,2427.42 2844.13,2447.68 2829.72,2453.36 2823.78,2445.16
  region net PWM_SERVO: 2850.1,2413.66 2829.47,2413.66 2832.6,2398.66 2842.6,2398.66
  region net VCC5: 2992.99,2441.03 3027.01,2446.2 3012.28,2452.54 2992.93,2443.6
  region net H4_1: 2992.99,2358.47 2992.99,2383.47 2985.3,2375.97 2985.3,2365.97
  region net H4_1: 3027.01,2383.4 3027.01,2358.4 3042.01,2365.83 3042.01,2375.83
  region net TX_DLD: 2092.5,2066.2 2067.5,2066.2 2075,2081.2 2085,2081.2
  region net J3_5: 2092.5,1975.14 2067.5,1975.14 2075,1960.67 2085,1960.67
  region net RX_DLD: 2157.5,2066.2 2132.5,2066.2 2140,2081.2 2150,2081.2
  region net J3_4: 2157.5,1975.14 2132.5,1975.14 2140,1960.14 2150,1960.14
  region net H4_1: 2888.78,2283.77 2888.78,2258.77 2903.78,2266.27 2903.78,2276.27
  region net PWM_SERVO: 2825.1,2374.65 2850.1,2374.65 2842.6,2389.65 2832.6,2389.65
  region net C27_2: 2299.99,3060.79 2330.01,3060.79 2321,3065.67 2309,3065.67
  region net C27_1: 2293.35,2955.23 2293.35,2985.25 2275.34,2976.24 2275.34,2964.24
  region net C26_2: 2303.36,3114.02 2273.34,3114.02 2261.84,3096 2278.83,3096
  region net VCC12: 2232.07,3153.6 2228.35,3157.32 2199.88,3157.32 2217.93,3167.74 2228.35,3157.32 2239.25,3157.32 2232.07,3153.6
  region net VCC12: 1895.75,3157.32 1935.12,3157.32 1925,3160.67 1905,3160.49
  region net GND: 1824.88,3114.02 1824.88,3157.32 1820,3145.67 1820,3125.67
  region net VCC12: 1895.75,3232.32 1935.12,3232.32 1925,3235.67 1905,3235.49
  region net GND: 1824.88,3189.02 1824.88,3232.32 1820,3220.67 1820,3200.67
  region net C22_2: 1977.72,2683.98 1977.72,2652.48 1997.97,2661.48 1997.97,2674.98
  region net C22_2: 1942.28,2652.48 1942.28,2683.98 1922.03,2674.98 1922.03,2661.48
  region net C22_2: 2012.28,2652.48 2012.28,2683.98 1992.03,2674.98 1992.03,2661.48
  region net C22_2: 2013.12,2683.98 2046.88,2683.98 2036.75,2685.67 2023.25,2685.67
  region net U2_3: 3033.36,3114.02 3003.34,3114.02 2991.84,3096 3008.83,3096
  region net VCC12: 2929.88,3157.32 2969.25,3157.32 2960,3160.5 2940,3160.67
  region net U2_1: 3004.87,3055.79 3034.89,3055.79 3013.49,3070.67 3000.75,3066.42
  region net U2_2: 3003.34,2950.23 3003.34,2980.25 2985.33,2971.24 2985.33,2959.24
  region net VCC12: 2232.07,3228.6 2228.35,3232.32 2199.88,3232.32 2217.93,3242.74 2228.35,3232.32 2239.25,3232.32 2232.07,3228.6
  region net GND: 2310.12,3232.32 2310.12,3189.02 2315,3200.67 2315,3220.67
  region net VCC3.3: 2088.35,2675.79 2121.76,2675.79 2094.17,2696.05 2075.07,2696.05
  region net VCC3.3: 2130.75,2636.42 2114.14,2630.67 2096.89,2636.42 2088.35,2636.42 2092.93,2637.74 2096.89,2636.42 2130.75,2636.42
  region net VCC3.3: 2793.12,2695.79 2826.88,2695.79 2816.75,2705.67 2803.25,2705.67
  region net VCC3.3: 2830.43,2695.79 2830.77,2684.86 2827.93,2692.74 2830.43,2695.79
  region net VCC3.3: 2835.43,2671.95 2831.66,2656.42 2830.77,2684.86 2835.43,2671.95
  region net VCC12: 2929.88,3232.32 2969.25,3232.32 2960,3235.49 2940,3235.67
  region net U2_15: 2697.29,2653.45 2697.29,2683.98 2677.03,2677.08 2677.03,2663.58
  region net U2_15: 2698.12,2683.98 2731.88,2683.98 2721.75,2685.67 2708.25,2685.67
  region net VCC12: 2647.07,3242.74 2665.12,3232.32 2636.65,3232.32 2647.07,3242.74
  region net VCC12: 2632.93,3228.6 2625.75,3232.32 2636.65,3232.32 2632.93,3228.6
  region net U2_15: 2627.29,2653.45 2627.29,2683.98 2607.03,2677.08 2607.03,2663.58
  region net U2_15: 2662.71,2683.98 2662.71,2653.45 2682.97,2663.58 2682.97,2677.08
  region net VCC12: 2647.07,3167.74 2665.12,3157.32 2636.65,3157.32 2647.07,3167.74
  region net VCC12: 2632.93,3153.6 2625.75,3157.32 2636.65,3157.32 2632.93,3153.6
  region net VCC3.3: 2881.64,2756.53 2868.36,2756.53 2870,2760.67 2880,2760.67
  region net VCC3.3: 2880.86,2744.03 2880.86,2757.31 2887.06,2755.67 2887.06,2745.67
  region net VCC3.3: 2184.14,2749.03 2184.14,2762.31 2177.94,2760.67 2177.94,2750.67
  region net VCC3.3: 2196.64,2761.53 2183.36,2761.53 2185,2765.67 2195,2765.67
  region net VCC12: 2888.29,3062.45 2876.43,3068.43 2873.57,3062.93 2885.57,3056.87
  region net VCC12: 2703.57,3068.43 2691.71,3062.45 2694.43,3056.87 2706.43,3062.93
  region net VCC12: 2173.29,3062.45 2161.43,3068.43 2158.57,3062.93 2170.57,3056.87
  region net VCC12: 1988.57,3068.43 1976.71,3062.45 1979.43,3056.87 1991.43,3062.93
  region net STDBY1: 2330.55,2501.83 2321.16,2511.22 2317.94,2505.68 2325.01,2498.61
  region net CHRG1: 2320.55,2526.83 2311.16,2536.22 2307.94,2530.68 2315.01,2523.61
  region net RX_DLD: 2411.64,2574.81 2398.36,2574.81 2400,2568.61 2410,2568.61
  region net TX_DLD: 2386.64,2584.81 2373.36,2584.81 2375,2578.61 2385,2578.61
  region net CHRG1: 2045.86,2514.03 2045.86,2527.31 2052.06,2525.67 2052.06,2515.67
  region net STDBY1: 2023.47,2548.09 2011.38,2542.58 2015,2537.42 2025,2541.97
  region net R1_CTRL: 2100.86,2439.03 2100.86,2452.31 2107.06,2450.67 2107.06,2440.67
  region net R2_CTRL: 2110.86,2464.03 2110.86,2477.31 2117.06,2475.67 2117.06,2465.67
  region net R3_CTRL: 2120.86,2489.03 2120.86,2502.31 2127.06,2500.67 2127.06,2490.67
  region net EN2: 2090.55,2734.51 2081.16,2725.11 2077.94,2730.66 2085.01,2737.73
  region net EN1: 2782.6,2755.22 2769.54,2757.64 2772.2,2763.45 2782.2,2761.6
  region net DIR2: 2044.73,2763.16 2031.98,2759.42 2031.61,2765.78 2041.61,2768.71
  region net DIR1: 2756.64,2761.53 2743.36,2761.53 2745,2767.73 2755,2767.73
  region net BOOT1: 2200.86,2224.03 2200.86,2237.31 2207.06,2235.67 2207.06,2225.67
  region net BOOT1: 2386.64,2364.81 2373.36,2364.81 2375,2358.61 2385,2358.61
  region net R3_CTRL: 2394.14,2734.03 2394.14,2747.31 2387.94,2745.67 2387.94,2735.67
  region net R2_CTRL: 2394.14,2709.03 2394.14,2722.31 2387.94,2720.67 2387.94,2710.67
  region net R1_CTRL: 2394.14,2684.03 2394.14,2697.31 2387.94,2695.67 2387.94,2685.67
  region net BOOT0: 2195.55,2141.83 2186.16,2151.22 2182.94,2145.68 2190.01,2138.61
  region net BOOT0: 2200.86,2144.03 2200.86,2157.31 2207.06,2155.67 2207.06,2145.67
  region net BOOT0: 2465.55,2431.83 2456.16,2441.22 2452.94,2435.68 2460.01,2428.61
  region net NRST: 2718.12,2262.38 2706.39,2268.61 2704.73,2262.47 2713.97,2257.56
  region net NRST: 2709.14,2264.03 2709.14,2277.31 2702.94,2275.67 2702.94,2265.67
  region net NRST: 2393.84,2236.22 2384.45,2226.83 2389.99,2223.61 2397.06,2230.68
  region net TX_LINUX: 2338.29,2362.55 2332.06,2374.28 2338.2,2375.94 2343.1,2366.7
  region net RX_LINUX: 2328.84,2390.11 2319.45,2399.51 2324.99,2402.73 2332.06,2395.66
  region net STEP2: 2136.64,2706.53 2123.36,2706.53 2125,2712.73 2135,2712.73
  region net STEP1: 2811.64,2766.53 2798.36,2766.53 2800,2772.73 2810,2772.73
  region net PWM_SERVO2: 2701.64,2116.53 2688.36,2116.53 2690,2122.73 2700,2122.73
  region net PWM_SERVO2: 2708.84,2466.22 2699.45,2456.83 2704.99,2453.61 2712.06,2460.68
  region net PWM_SERVO: 2705.86,2484.03 2705.86,2497.31 2712.06,2495.67 2712.06,2485.67
  region net GND: 2962.25,2845.58 2949.05,2844.11 2950.33,2838.01 2962.34,2839.35
  region net U2_17: 2683.32,2763.88 2671.44,2757.94 2668.63,2762.49 2681.37,2768.85
  region net U2_24: 2861.64,2839.81 2848.36,2839.81 2849,2833.61 2861,2833.61
  region net U2_19: 2731.64,2839.81 2718.36,2839.81 2719,2833.61 2731,2833.61
  region net R18_1: 1968.47,2763.82 1956.48,2758.09 1953.05,2763.32 1966.55,2769.78
  region net R20_1: 2146.64,2839.81 2133.36,2839.81 2134,2833.61 2146,2833.61
  region net R19_1: 2016.64,2839.81 2003.36,2839.81 2004,2833.61 2016,2833.61
  region net GND: 2618.84,3056.22 2609.45,3046.83 2614.28,3042.9 2622.77,3051.39
  region net GND: 1903.84,3056.22 1894.45,3046.83 1899.28,3042.9 1907.77,3051.39
  region net GND: 2238.84,2856.22 2229.45,2846.83 2233.75,2842.37 2243.3,2851.92
  region net GND: 3145.05,3231.88 3033.73,3304.43 3034.13,3230.15 3076.94,3202.25
  region net J3_5: 2034.01,1885.73 2005.61,1930.65 2038.04,1925.78 2043.51,1917.11
  region net J3_4: 2135.43,1896.05 2095.2,1930.77 2127.72,1935.46 2135.31,1928.91
  region net BOOT0: 2226.57,1919.11 2173.43,1919.11 2195,1943.91 2205,1943.91
  region net NRST: 2326.57,1919.11 2273.43,1919.11 2295,1935.67 2305,1935.67
  region net R5_2: 2458.03,3287.98 2491.43,3321.38 2493.86,3292.62 2486.79,3285.55
  region net R6_2: 2439.17,3217.05 2439.17,3264.29 2425,3245.67 2425,3235.67